# EAGLE board schematic_v1 (EAGLE 9.6.2)
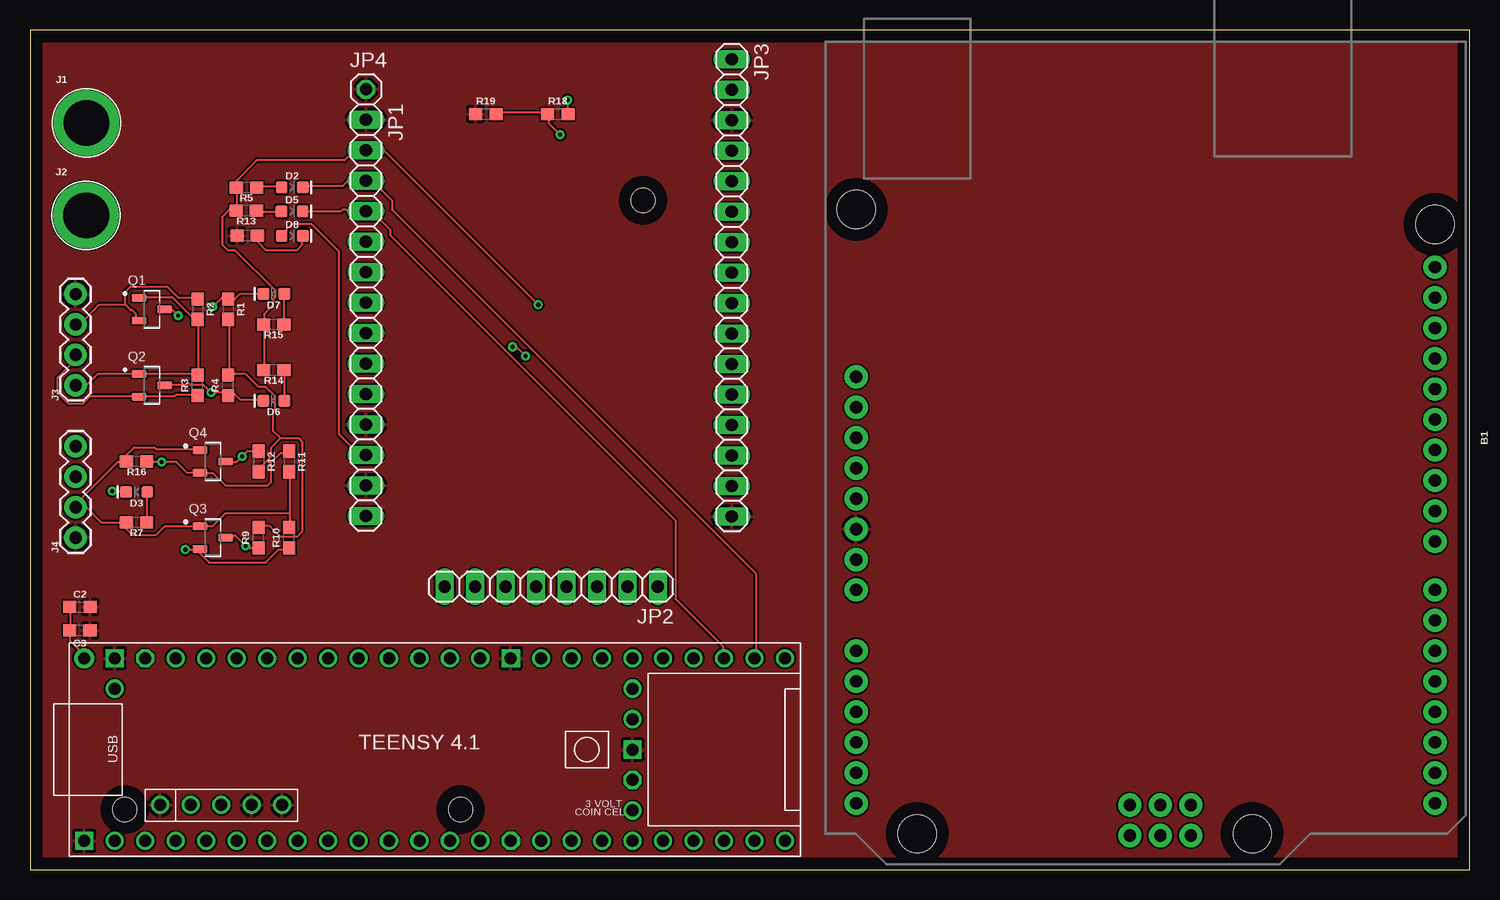
[diagram p0: board, top side]
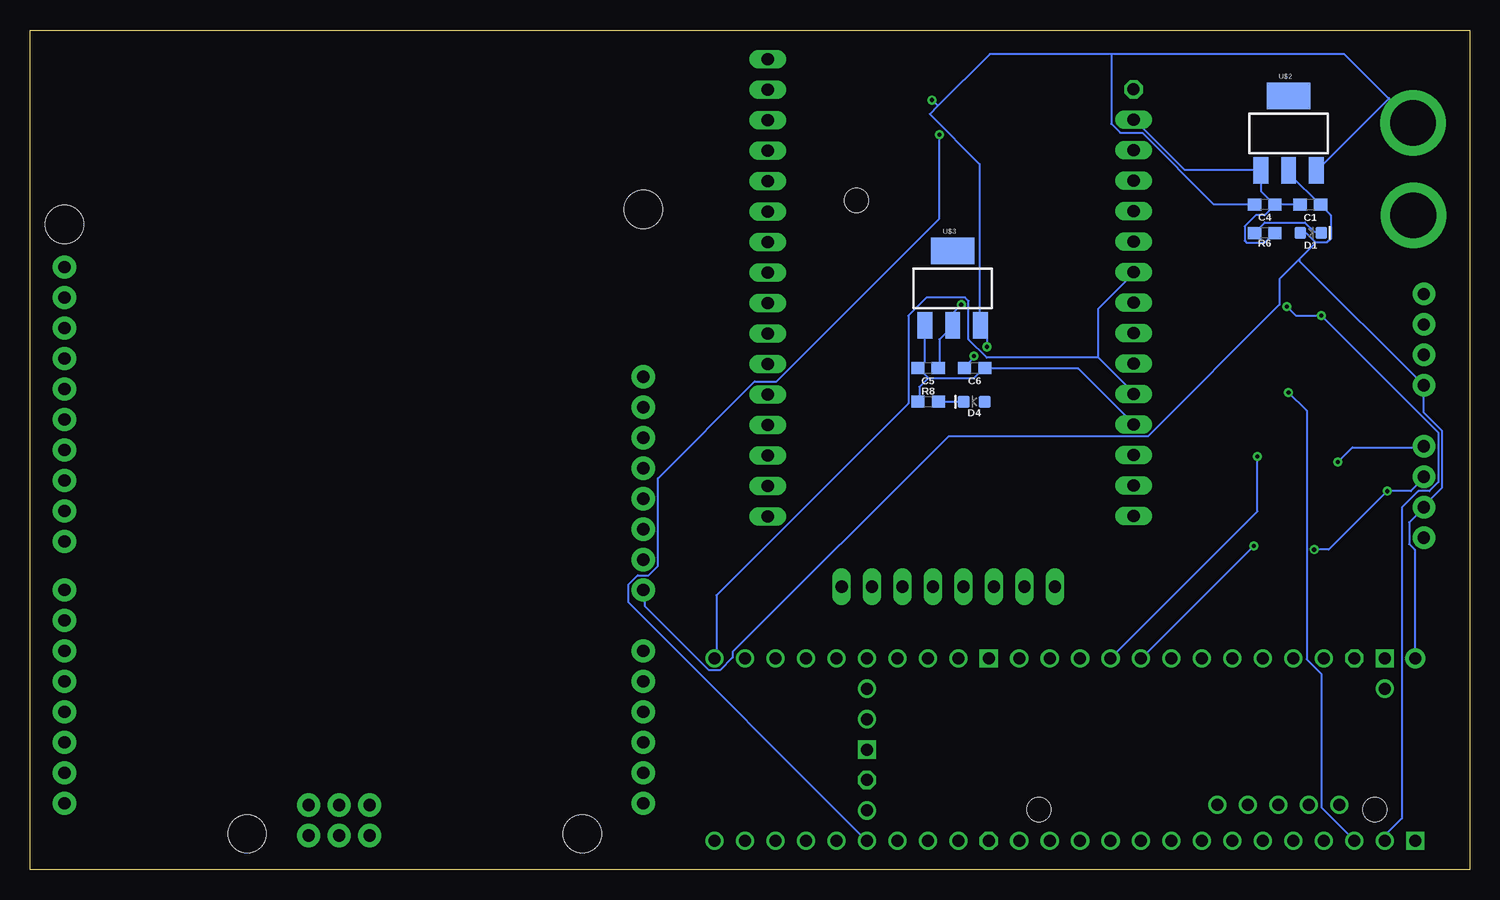
[diagram p1: board, bottom side, seen from below]

Size 120 x 70 mm. Coordinates in mm from the lower left corner, seen from the top.
Outline: 0,0 120,0 120,70 0,70 0,0
Copper layers (1*16): Top 0.035mm / dielectric 1.5mm / Bottom 0.035mm
Design rules "default": minimum track width 6mil, minimum drill 0.35mm, track to track 6mil, track to pad 6mil, pad to pad 6mil, via to via 6mil, smd to smd 6mil, copper to edge 40mil, drill to drill 6mil, minimum pad ring 10mil, minimum via ring 8mil, stop-mask expansion 4mil, vias tented up to drill 0mil, thermal gap 10mil
Holes 2 mm at 51.1,55.8 35.9,5 7.9,5

## Footprints (pad centres in the part's own frame; a part is rotated, then mirrored left to right if it is on the bottom)
ARDUINO_R3 = drill 1.016 pad 1.93: 3.3V 2.54,-24.13; 5V 5.08,-24.13; A0 17.78,-24.13; A1 20.32,-24.13; A2 22.86,-24.13; A3 25.4,-24.13; A4 27.94,-24.13; A5 30.48,-24.13; AREF -9.144,24.13; D0 30.48,24.13; D1 27.94,24.13; D2 25.4,24.13; D3 22.86,24.13; D4 20.32,24.13; D5 17.78,24.13; D6 15.24,24.13; D7 12.7,24.13; D8 8.636,24.13; D9 6.096,24.13; D10 3.556,24.13; D11 1.016,24.13; D12 -1.524,24.13; D13 -4.064,24.13; GND@1 7.62,-24.13; GND@2 10.16,-24.13; GND@3 -6.604,24.13; GND@4 33.16,-1.32; IOREF -2.54,-24.13; MISO 30.62,3.76; MOSI 33.16,1.22; NC -5.08,-24.13; RESET@1 0,-24.13; RESET@2 30.62,-1.32; SCK 30.62,1.22; SCL -14.224,24.13; SDA -11.684,24.13; VCC 33.16,3.76; VIN 12.7,-24.13 | hole 3.175: -17.78,24.13; 33.02,8.89; 33.02,-19.05; -19.05,-24.13
0603 = smd 1.1 x 1: 1 -0.85,0; 2 0.85,0
LED-0603 = smd 1 x 1: A -0.877,0; C 0.877,0
BANANA_CONN = drill 3.81 pad 5.461: P$1 0,0
1X04 = drill 1.016 pad 1.88: 1 0,0; 2 2.54,0; 3 5.08,0; 4 7.62,0
1X14 = drill 1.016 long: 1 -16.51,0; 2 -13.97,0; 3 -11.43,0; 4 -8.89,0; 5 -6.35,0; 6 -3.81,0; 7 -1.27,0; 8 1.27,0; 9 3.81,0; 10 6.35,0; 11 8.89,0; 12 11.43,0; 13 13.97,0; 14 16.51,0
1X08 = drill 1.016 long: 1 -8.89,0; 2 -6.35,0; 3 -3.81,0; 4 -1.27,0; 5 1.27,0; 6 3.81,0; 7 6.35,0; 8 8.89,0
1X16 = drill 1.016 long: 1 -19.05,0; 2 -16.51,0; 3 -13.97,0; 4 -11.43,0; 5 -8.89,0; 6 -6.35,0; 7 -3.81,0; 8 -1.27,0; 9 1.27,0; 10 3.81,0; 11 6.35,0; 12 8.89,0; 13 11.43,0; 14 13.97,0; 15 16.51,0; 16 19.05,0
1X01 = drill 1.016 octagon: 1 0,0
SOT95P240X111-3N = smd 1.23 x 0.6: 1 -1.06,0.95; 2 -1.06,-0.95; 3 1.06,0
SOT223 = smd 1.219 x 2.235: 1 -2.311,-3.099; 2 0,-3.099; 3 2.311,-3.099 | smd 3.6 x 2.2: 4 0,3.099
TENNSY41-E = drill 1: 0-RX1/CS1/CRX2 -27.94,-7.62; 1-TX1/MISO1/CTX2 -25.4,-7.62; 2-OUT2 -22.86,-7.62; 3-LRCLK2 -20.32,-7.62; 4-BCLK2 -17.78,-7.62; 5-IN2 -15.24,-7.62; 6-OUT1D -12.7,-7.62; 7-RX2/OUT1A -10.16,-7.62; 8-TX2/IN1 -7.62,-7.62; 9-OUT1C -5.08,-7.62; 10-CS\MQSR -2.54,-7.62; 11-MOSI/CTX1 0,-7.62; 12-MISO/MQSL 2.54,-7.62; 13-SCK/LED 2.54,7.62; 14-A0/TX3/SPDIF_OUT 0,7.62; 15-A1/RX3/SPDIF_IN -2.54,7.62; 16-A2/RX4/SCL1 -5.08,7.62; 17-A3/TX4/SDA1 -7.62,7.62; 18-A4/SDA0 -10.16,7.62; 19-A5/SCL0 -12.7,7.62; 20-A6/TX5/LRCLK1 -15.24,7.62; 21-A7/RX5/BCLK1 -17.78,7.62; 22-A8/CTX1 -20.32,7.62; 23-A9/CRX1/MCLK1 -22.86,7.62; 24-A10/TX6/SCL2 7.62,-7.62; 25-A11/RX6/SDA2 10.16,-7.62; 26-A12/MOSI1 12.7,-7.62; 27-A13/SCK1 15.24,-7.62; 28-RX7 17.78,-7.62; 29-TX7 20.32,-7.62; 30-CRX3 22.86,-7.62; 31-CTX3 25.4,-7.62; 32-OUT1B 27.94,-7.62; 33-MCLK2 27.94,7.62; 34-RX8 25.4,7.62; 35-TX8 22.86,7.62; 36-PWM 20.32,7.62; 37-PWM 17.78,7.62; 38-A14/CS/IN1 15.24,7.62; 39-A15/CS/OUT1A 12.7,7.62; 40-A16/CS1 10.16,7.62; 41-A17/MISO1 7.62,7.62; +5V -24.13,-4.62; DM -21.59,-4.62; DP -19.05,-4.62; GND4 -16.51,-4.62; GND5 -13.97,-4.62; ON/OFF 15.24,5.08; PROGRAM 15.24,2.54; VBAT 15.24,-5.08; VUSB -27.94,5.08 | drill 1 octagon: 3V3-1 5.08,-7.62; 3V3-2 15.24,-2.54; 3V3-3 -25.4,7.62 | drill 1 square: GND1 -30.48,-7.62; GND2 15.24,0; GND3 5.08,7.62; GND6 -27.94,7.62 | drill 1 pad 1.676: VIN -30.48,7.62

## Placement (x,y rotation side)
B1  ARDUINO_UNO_R3  [ARDUINO_R3]  93,36 270 top
C1  10uF  [0603]  13.27,55.42 180 bottom
C2  10uF  [0603]  4.16,21.88 0 top
C3  0.1uF  [0603]  4.15,19.92 180 top
C4  1.0uF  [0603]  17.07,55.44 180 bottom
C5  10uF  [0603]  45.14,41.8 180 bottom
C6  1.0uF  [0603]  41.25,41.8 180 bottom
D1  RED  [LED-0603]  13.23,53.1 0 bottom
D2  GREEN  [LED-0603]  21.86,56.89 0 top
D3  BLUE  [LED-0603]  8.89,31.48 180 top
D4  RED  [LED-0603]  41.28,39.01 180 bottom
D5  GREEN  [LED-0603]  21.85,54.89 0 top
D6  GREEN  [LED-0603]  20.32,39.1 180 top
D7  GREEN  [LED-0603]  20.32,47.99 180 top
D8  GREEN  [LED-0603]  21.86,52.83 0 top
J1  [BANANA_CONN]  4.7,62.25 0 top
J2  [BANANA_CONN]  4.68,54.55 0 top
J3  [1X04]  3.81,40.37 90 top
J4  [1X04]  3.81,27.67 90 top
JP1  [1X14]  28,46 270 top
JP2  [1X08]  43.45,23.59 180 top
JP3  [1X16]  58.5,48.5 270 top
JP4  [1X01]  28.01,65.05 0 top
Q1  BSS138  [SOT95P240X111-3N]  10.16,46.72 0 top
Q2  BSS138  [SOT95P240X111-3N]  10.16,40.37 0 top
Q3  BSS138  [SOT95P240X111-3N]  15.24,27.67 0 top
Q4  BSS138  [SOT95P240X111-3N]  15.24,34.02 0 top
R1  10k  [0603]  16.51,46.72 270 top
R2  10k  [0603]  13.97,46.72 270 top
R3  10k  [0603]  13.97,40.37 90 top
R4  10k  [0603]  16.51,40.37 90 top
R5  10k  [0603]  18.05,56.87 180 top
R6  10k  [0603]  17.07,53.08 180 bottom
R7  10k  [0603]  8.89,28.94 180 top
R8  10k  [0603]  45.12,39.01 0 bottom
R9  10k  [0603]  19.05,27.67 90 top
R10  10k  [0603]  21.59,27.67 90 top
R11  10k  [0603]  21.59,34.02 270 top
R12  10k  [0603]  19.05,34.02 270 top
R13  10k  [0603]  18.03,54.93 180 top
R14  10k  [0603]  20.32,41.64 180 top
R15  10k  [0603]  20.32,45.45 180 top
R16  10k  [0603]  8.89,34.02 180 top
R17  10k  [0603]  18.11,52.87 0 top
R18  10k  [0603]  44,63 0 top
R19  8.2k  [0603]  38,63 0 top
U$2  SOTP223 5V  [SOT223]  15.08,61.39 0 bottom
U$3  SOTP223 5V  [SOT223]  43.08,48.47 0 bottom
U$4  TEENSY41-E  [TENNSY41-E]  35,10 0 top

## Library data of the parts
B1 = SparkFun-Boards
C1 C2 C5 = SparkFun-Capacitors; PROD_ID: CAP-11015
C3 = SparkFun-Capacitors; PROD_ID: CAP-00810
C4 C6 = SparkFun-Capacitors; PROD_ID: CAP-00868
D1 D4 = SparkFun-LED; PROD_ID: DIO-00819
D2 D5-D8 = SparkFun-LED; PROD_ID: DIO-00821
D3 = SparkFun-LED; PROD_ID: DIO-08575
J1 J2 J4 = SparkFun-Connectors
J3 = SparkFun-Connectors; PROD_ID: CONN-09696
JP1-JP4 = pinhead
Q1 Q2 = BSS138; AVAILABILITY: Good; DESCRIPTION: N-Channel 50V 220mA (Ta) 360mW (Ta) Surface Mount SOT-23-3; MF: ON Semiconductor; MP: BSS138; PACKAGE: SOT-23 ON Semiconductor; PRICE: None; PURCHASE-URL: https://pricing.snapeda.com/search/part/BSS138/?ref=eda
Q3 Q4 = BSS138; AVAILABILITY: Good; DESCRIPTION: N-Channel 50V 220mA (Ta) 360mW (Ta) Surface Mount SOT-23-3; MF: ON Semiconductor; MP: BSS138; PACKAGE: SOT-23 ON Semiconductor; PRICE: None; PURCHASE-URL: https://pricing.snapeda.com/search/part/BSS138/?ref=eda; SPICEPREFIX: Q
R1-R8 R13-R18 = SparkFun-Resistors; PROD_ID: RES-00824
R9-R12 = SparkFun-Resistors; PROD_ID: RES-00824; SPICEPREFIX: R
R19 = SparkFun-Resistors; PROD_ID: RES-10646
U$2 U$3 = SparkFun-IC-Power; PROD_ID: VREG-13917
U$4 = teensy

## Nets
+3.3V: C5.1 JP1.2 R5.2 R13.2 R14.2 R15.2 U$3.2
+5V: B1.VIN C1.1 C2.1 C3.2 D1.A J3.1 J4.2 Q1.1 Q2.1 Q3.1 Q4.1 R2.2 R3.2 R7.2 R10.2 R11.2 R16.2 U$2.2 U$4.VIN
+5V1: D4.A
+15V: C4.2 C6.2 J1.P$1 R18.2 U$2.3 U$3.3
CAN_RX: J3.3 Q1.2 R2.1
CAN_RX1: D3.C J4.3 Q3.2 R10.1
CAN_TX: J3.2 Q2.2 R3.1
CAN_TX1: J4.4 Q4.2 R11.1 R16.1
GND: B1.GND@1 C1.2 C2.2 C3.1 C4.1 C5.2 C6.1 J2.P$1 J3.4 J4.1 JP1.1 JP1.11 JP1.13 JP3.3 JP3.16 JP4.1 R6.1 R8.1 R17.1 R19.1 U$2.1 U$3.1 U$4.+5V U$4.GND1 U$4.GND2 U$4.GND3 U$4.GND4 U$4.GND5 U$4.GND6
N$1: D5.C JP1.4 U$4.35-TX8
N$2: D2.C JP1.3 U$4.34-RX8
N$3: D8.A JP1.12
N$4: D3.A R7.1
N$5: D7.C Q1.3 R1.1 U$4.0-RX1/CS1/CRX2
N$6: D5.A R13.1
N$7: D1.C R6.2
N$8: D2.A R5.1
N$10: D4.C R8.2
N$11: D6.C Q2.3 R4.1 U$4.1-TX1/MISO1/CTX2
N$12: D8.C R17.2
N$13: D7.A R15.1
N$14: D6.A R14.1
N$15: U$4.37-PWM
POWER_DIVIDED: R18.1 R19.2 U$4.27-A13/SCK1
RESET_: JP1.6 JP1.10 U$4.33-MCLK2
SCL: Q4.3 R12.1 U$4.16-A2/RX4/SCL1
SDA: Q3.3 R9.1 U$4.17-A3/TX4/SDA1
TEENSY_3.3V: R1.2 R4.2 R9.2 R12.2

## Tracks (layer width: path | path; a pad name or v marks a point on that pad's centre or on a via)
+3.3V  (via drill 0.35)
  Top 0.152: R14.2 19.51,41.76 19.51,45.41 R15.2 19.51,45.57 19.51,46.33 20.27,47.09 20.27,47.55 20.42,47.7 20.42,48.31 17.07,51.66 16.46,51.66 16,52.12 16,54.41 16.61,55.02 17.07,55.02 R13.2 17.22,55.02 17.22,56.84 R5.2 17.22,57 17.22,57.45 18.9,59.13 26.21,59.13 26.98,59.89 27.89,59.89 JP1.2 28.04,59.89 29.57,59.89 v42.37,47.09
  Bottom 0.152: C5.1 44.2,41.91 44.2,44.2 43.13,45.26 U$3.2 42.98,45.41 42.98,46.48 v42.37,47.09
+5V
  Top 0.152: Q1.1 9.14,47.7 11.89,47.7 13.87,45.72 R2.2 14.02,45.72 14.02,41.3 R3.2 13.87,41.3 9.14,41.3 Q2.1 8.99,41.3 5.64,41.3 4.72,40.39 3.81,40.39 J3.1 | C2.1 3.35,21.79 3.35,19.96 C3.2 3.35,19.81 3.35,19.05 4.42,17.98 4.42,17.68 U$4.VIN | 21.64,29.72 21.64,33.07 R11.2 | 21.64,29.72 21.64,28.65 R10.2 | 4.27,30.18 3.81,30.18 J4.2 4.27,30.18 | 4.27,30.18 4.72,30.18 5.94,28.96 7.92,28.96 R7.2 7.92,28.8 7.92,28.5 8.53,27.89 10.52,27.89 11.28,28.65 14.17,28.65 Q3.1 14.33,28.65 15.24,28.65 16.31,29.72 21.64,29.72 | 4.27,30.18 4.27,30.94 7.32,33.98 7.92,33.98 R16.2 8.08,34.14 8.08,34.59 8.69,35.2 10.36,35.2 10.52,35.05 14.17,35.05 Q4.1
  Bottom 0.152: U$4.VIN 4.57,17.68 4.57,26.67 5.03,27.13 5.03,28.96 3.81,30.18 J4.2 3.81,30.33 2.29,31.85 2.29,36.58 3.81,38.1 J3.1 3.81,40.39 14.17,50.75 14.17,50.9 | 12.8,52.27 13.56,53.03 14.02,53.03 D1.A | 12.8,52.27 11.89,52.27 11.58,52.58 11.58,54.56 12.34,55.32 C1.1 12.5,55.47 14.94,57.91 14.94,58.22 U$2.2 | 12.8,52.27 14.17,50.9 | 14.17,50.9 15.85,49.23 15.85,47.09 26.82,36.12 43.43,36.12 61.42,18.14 61.42,17.68 62.48,16.61 63.4,16.61 68.73,21.95 68.73,23.16 B1.VIN
+15V  (via drill 0.35)
  Top 0.152: v41.3,42.82 40.54,43.59 v40.23,43.59 | v44.81,64.16 44.81,63.09 R18.2
  Bottom 0.152: J1.P$1 6.73,64.28 | 6.73,64.28 10.45,68 29.87,68 | 44.32,63.68 40,68 29.87,68 | 44.32,63.68 45,63 44.96,62.94 40.84,58.83 40.84,45.41 U$3.3 40.69,45.26 40.23,44.81 v40.23,43.59 | v41.3,42.82 41.3,42.67 42.06,41.91 C6.2 | 29.87,68 29.87,62.18 29.11,61.42 27.28,61.42 21.34,55.47 17.98,55.47 C4.2 | 44.32,63.68 v44.81,64.16 | 6.73,64.28 12.65,58.37 U$2.3 | 6.71,64.31 6.73,64.28
CAN_RX
  Top 0.152: 7.92,47.09 7.92,48.16 8.38,48.62 11.43,48.62 12.34,47.7 13.87,47.7 R2.1 | 7.92,47.09 8.38,46.63 8.53,46.63 8.84,46.33 8.84,45.87 8.99,45.72 Q1.2 | 7.92,47.09 5.79,47.09 4.27,45.57 3.81,45.57 J3.3
CAN_RX1  (via drill 0.35)
  Top 0.152: 14.17,26.67 14.17,26.36 14.94,25.6 19.66,25.6 20.73,26.67 21.49,26.67 R10.1 | v6.86,31.55 7.92,31.55 D3.C | v12.95,26.67 14.17,26.67 | 14.17,26.67 Q3.2
  Bottom 0.152: J4.3 3.81,32.61 4.88,31.55 v6.86,31.55 11.73,26.67 v12.95,26.67
CAN_TX
  Top 0.152: R3.1 13.87,39.62 12.19,39.62 12.04,39.47 9.14,39.47 Q2.2 8.99,39.47 5.03,39.47 4.42,38.86 3.2,38.86 2.29,39.78 2.29,41 3.81,42.52 J3.2
CAN_TX1  (via drill 0.35)
  Top 0.152: R16.1 9.75,33.98 v10.97,33.98 12.19,33.98 13.11,33.07 Q4.2 14.33,33.07 15.24,33.07 16.31,32 19.81,32 20.12,32.31 20.12,33.98 20.88,34.75 21.49,34.75 R11.1
  Bottom 0.152: v10.97,33.98 9.75,35.2 3.81,35.2 J4.4
GND
  Bottom 0.152: 45.11,41 41.3,41 40.54,41.76 C6.1 40.39,41.76 32.61,41.76 28.04,37.19 JP1.11 | 45.11,41 45.87,41.76 C5.2 45.87,41.91 45.41,42.37 45.41,45.26 U$3.1 | 45.11,41 45.87,40.23 45.87,39.01 R8.1 | C1.2 14.17,55.47 16.15,55.47 C4.1 | R6.1 16.31,53.03 17.07,52.27 18.59,52.27 18.75,52.43 18.75,53.65 17.83,54.56 17.07,54.56 16.31,55.32 C4.1 | C4.1 16.31,55.47 17.37,56.54 17.37,58.22 U$2.1 17.53,58.37 23.77,58.37 27.89,62.48 JP1.1
  pour Top: 0,70 120,70 120,0 0,0
N$1
  Top 0.152: D5.C 22.86,54.86 25.91,54.86 26.06,55.02 26.36,55.02 26.52,54.86 27.89,54.86 JP1.4 28.04,54.86 28.5,54.86 30.02,53.34 30.02,52.88 53.8,29.11 53.8,22.55 57.76,18.59 57.76,17.68 U$4.35-TX8
N$2
  Top 0.152: D2.C 22.86,57 26.06,57 26.52,57.45 27.89,57.45 JP1.3 28.04,57.3 28.65,57.3 30.18,55.78 30.18,55.02 60.5,24.69 60.5,17.68 U$4.34-RX8
N$3
  Top 0.152: D8.A 21.03,52.88 21.34,53.19 21.34,53.34 21.79,53.8 23.47,53.8 25.76,51.51 25.76,36.27 27.43,34.59 27.89,34.59 JP1.12
N$4
  Top 0.152: D3.A 9.75,31.39 9.75,28.96 R7.1
N$5  (via drill 0.35)
  Top 0.152: D7.C 19.36,48.01 17.53,48.01 17.07,47.55 16.61,47.55 R1.1 16.46,47.7 16,47.7 v15.24,46.94 | v12.34,46.18 11.89,46.63 11.28,46.63 Q1.3
  Bottom 0.152: v15.24,46.94 14.48,46.18 v12.34,46.18 2.59,36.42 2.59,32.31 3.35,31.55 4.27,31.55 5.64,30.18 5.64,4.27 7.01,2.9 7.01,2.44 U$4.0-RX1/CS1/CRX2
N$6
  Top 0.152: D5.A 20.88,54.86 18.9,54.86 R13.1
N$7
  Bottom 0.152: D1.C 12.5,53.19 12.95,53.19 13.72,53.95 17.07,53.95 17.83,53.19 R6.2
N$8
  Top 0.152: D2.A 20.88,57 19.05,57 R5.1
N$10
  Bottom 0.152: D4.C 42.22,39.01 44.2,39.01 R8.2
N$11  (via drill 0.35)
  Top 0.152: D6.C 19.36,39.17 17.53,39.17 17.07,39.62 16.61,39.62 R4.1 16.46,39.62 16.31,39.78 v15.09,39.78 14.48,40.39 13.41,40.39 13.26,40.54 13.11,40.54 12.95,40.39 11.28,40.39 Q2.3
  Bottom 0.152: v15.09,39.78 13.56,38.25 13.56,17.53 12.34,16.31 12.34,5.18 9.6,2.44 U$4.1-TX1/MISO1/CTX2
N$12
  Top 0.152: D8.C 22.71,52.73 22.71,52.12 22.25,51.66 19.66,51.66 18.9,52.43 18.9,52.73 R17.2
N$13
  Top 0.152: D7.A 21.18,47.85 21.18,45.57 R15.1
N$14
  Top 0.152: D6.A 21.18,39.17 21.18,41.6 R14.1
POWER_DIVIDED  (via drill 0.35)
  Top 0.152: R19.2 38.86,63.09 43.13,63.09 R18.1 43.28,62.94 43.28,62.18 v44.2,61.27
  Bottom 0.152: v44.2,61.27 44.2,54.25 57.76,40.69 59.59,40.69 67.67,32.61 67.67,25.3 68.43,24.54 69.34,24.54 70.1,23.77 70.1,22.25 50.29,2.44 U$4.27-A13/SCK1
RESET_
  Bottom 0.152: 30.94,42.67 40.23,42.67 41.76,44.2 41.76,47.4 42.06,47.7 45.26,47.7 46.79,46.18 46.79,38.86 62.79,22.86 62.79,17.68 U$4.33-MCLK2 | 30.94,42.67 28.04,39.78 JP1.10 | 30.94,42.67 30.94,46.79 28.04,49.68 JP1.6
SCL  (via drill 0.35)
  Top 0.152: R12.1 19.05,34.9 18.14,34.9 v17.68,34.44 17.22,33.98 16.31,33.98 Q4.3
  Bottom 0.152: v17.68,34.44 17.68,29.87 29.87,17.68 U$4.16-A2/RX4/SCL1
SDA  (via drill 0.35)
  Top 0.152: R9.1 18.14,26.82 v17.98,26.98 17.07,27.89 16.92,27.74 16.31,27.74 Q3.3
  Bottom 0.152: v17.98,26.98 27.28,17.68 U$4.17-A3/TX4/SDA1
TEENSY_3.3V
  Top 0.152: 16.61,41.3 16.61,45.72 R1.2 | 20.88,35.97 22.4,35.97 22.71,35.66 22.71,28.19 22.25,27.74 20.88,27.74 19.96,28.65 19.05,28.65 R9.2 | 20.88,35.97 20.12,35.2 20.12,34.44 19.05,33.38 R12.2 | 16.61,41.3 17.98,41.3 19.05,40.23 19.66,40.23 20.42,39.47 20.42,38.41 20.27,38.25 20.27,36.58 20.88,35.97 | 16.61,41.3 R4.2